# Altium PCB PCB2.PcbDoc (part 2 of 3)
Units mil, origin at the board's own origin, x right, y up, seen from the top; angles counter-clockwise.
Board outline 5145 x 1874.68 mil, 6 copper layers (Top Copper, Signal Layer 1, Signal Layer 2, Signal Layer 3, Signal Layer 4, Bottom Copper), stack 60.567 mil thick; 68 components, 78 nets, 530 pads, 288 vias.
Unrouted connection lines stored in the file: 13.
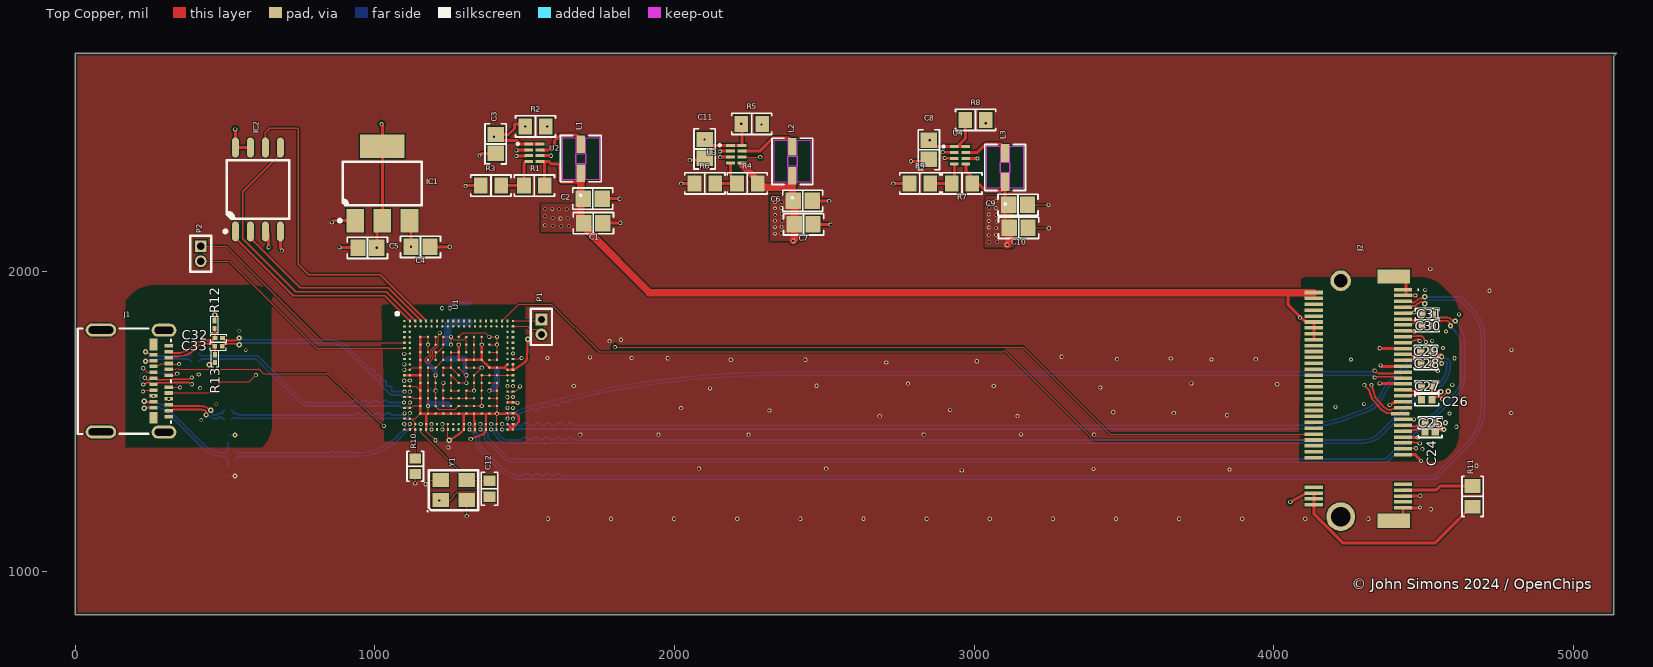
[diagram p0: Top Copper view]

## Via types
v1: diameter 13.78, hole 7.87, Top Copper to Bottom Copper, 220 vias
v2: diameter 11.81, hole 7.87, Top Copper to Bottom Copper, 44 vias
v3: diameter 17.72, hole 7.87, Top Copper to Bottom Copper, 24 vias

## Nets (pads, with @x,y where several pads share a name; then routed paths per layer and width w, separated by ;. In a path a pad name is that pad's centre, name@x,y a point inside that pad or via, vN(x,y) a via of type N, cw(c..) or ccw(c..) an arc to the next point about the centre after c; other vN are vias at no path point) (continued)
GND: C1.1 C2.1 C3.1 C4.1 C5.1 C6.1 C7.1 C8.1 C9.1 C10.1 C11.1 C13.1 C14.1 C15.1 C16.1 C17.1 C18.1 C19.1 C20.1 C21.1 C22.1 C23.1 IC1.1 IC2.4 J1.A1 J1.A12 J1.B1 J1.B12 J1.S J2.1 J2.3 J2.9 J2.15 J2.21 J2.27 J2.33 J2.39 J2.45 J2.51 J2.57 J2.71 J2.75 J2.MP1 J2.MP2 R3.1 R6.1 R9.1 R10.1 R12.2 R13.1 R14.2 R15.2 U1.AA1 U1.AA2 U1.AA5 U1.AA9 U1.AA12 U1.AA14 U1.AA16 U1.AA18 U1.AA20 U1.AA21 U1.D4 U1.D5 U1.D11 U1.D17 U1.D18 U1.E4 U1.E5 U1.E17 U1.E18 U1.F4 U1.F5 U1.F8 U1.F17 U1.F18 U1.H4 U1.H8 U1.H17 U1.H18 U1.H21 U1.J4 U1.J5 U1.J6 U1.J11 U1.K2 U1.L1 U1.L2 U1.L4 U1.L5 U1.L9 U1.L13 U1.M20 U1.M21 U1.N1 U1.N2 U1.N4 U1.N5 U1.N9 U1.N11 U1.N13 U1.N17 U1.N18 U1.P4 U1.P5 U1.P9 U1.P11 U1.P17 U1.P18 U1.P20 U1.P21 U1.R1 U1.R2 U1.T4 U1.T5 U1.T17 U1.T18 U1.T20 U1.T21 U1.U1 U1.U2 U1.U4 U1.U5 U1.U17 U1.U18 U1.V4 U1.V5 U1.V6 U1.V8 U1.V9 U1.V11 U1.V13 U1.V14 U1.V16 U1.V17 U1.V18 U1.V20 U1.V21 U1.W1 U1.W2 U1.Y3 U1.Y5 U1.Y9 U1.Y12 U1.Y14 U1.Y16 U1.Y18 U1.Y20 U1.Y21 U2.2 U2.3 U3.2 U3.3 U4.2 U4.3 Y1.2 Y1.4 | length 5285.2
  Top Copper w3.5: U1.AA1@1098.9,1473.9 U1.AA2@1117.01,1473.9 1120.86,1473.9 1134.28,1487.32 1134.28,1491.17 U1.Y3@1135.12,1492.01 1134.28,1492.84 1134.28,1496.93 1121.1,1510.12 ; U1.W1@1098.9,1510.12 U1.W2@1117.01,1510.12 1121.1,1510.12 ; U1.U1@1098.9,1546.34 U1.U2@1117.01,1546.34 1122.32,1546.34 1128.62,1552.64 U1.U4@1152.05,1552.64 ; U1.R1@1098.9,1582.56 U1.R2@1117.01,1582.56 1123.31,1582.56 1127.64,1578.23 U1.T4@1152.05,1578.23 ; U1.N1@1098.9,1618.78 1137.09,1618.78 U1.P4@1152.05,1603.82 ; U1.K2@1117.01,1673.11 1124.49,1680.59 U1.J4@1152.05,1680.59 ; v1(1134.84,1294.29) R10.1@1134.84,1325.79 ; U1.V4@1152.05,1527.05 1135.12,1510.12 1121.1,1510.12 ; U1.D4@1152.05,1782.95 U1.D5@1177.64,1782.95 v1(1177.64,1757.36) U1.F5@1177.64,1731.77 ; v1(1169.29,1291.34) 1183.07,1305.12 Y1.4@1219.49,1305.12 ; U1.AA5@1171.34,1473.9 1172.18,1473.06 1172.18,1468.57 v1(1202.76,1437.99) ; U1.V5@1177.64,1527.05 v1(1177.64,1552.64) U1.T5@1177.64,1578.23 U1.P5@1177.64,1603.82 U1.N5@1177.64,1629.41 U1.L5@1177.64,1655 U1.J5@1177.64,1680.59 U1.J6@1203.23,1680.59 U1.H8@1228.82,1706.18 U1.F8@1228.82,1731.77 ; U1.Y9@1243.78,1492.01 U1.AA9@1243.78,1473.9 1243.78,1446.09 1248.03,1441.84 v3(1248.03,1437.99) ; U1.P11@1280,1603.82 U1.P9@1254.41,1603.82 U1.N9@1254.41,1629.41 U1.L9@1254.41,1655 U1.N11@1280,1629.41 v1(1305.59,1629.41) v1(1305.59,1655) U1.J11@1280,1680.59 ; U1.D11@1280,1782.95 1294.29,1797.24 1368.07,1797.24 v1(1382.36,1782.95) v1(1407.95,1782.95) v1(1407.95,1757.36) ; Y1.2@1306.1,1238.19 1306.1,1185.8 v1(1307.11,1184.79) ; U1.U17@1382.36,1552.64 U1.U18@1407.95,1552.64 ; U1.T17@1382.36,1578.23 U1.T18@1407.95,1578.23 ; v1(1382.36,1603.82) U1.P18@1407.95,1603.82 ; U1.N17@1382.36,1629.41 U1.N18@1407.95,1629.41 U1.P18@1407.95,1603.82 ; U1.H17@1382.36,1706.18 U1.H18@1407.95,1706.18 U1.F18@1407.95,1731.77 ; U1.F17@1382.36,1731.77 U1.F18@1407.95,1731.77 ; U1.E17@1382.36,1757.36 v1(1407.95,1757.36) ; U1.AA18@1406.77,1473.9 U1.Y18@1406.77,1492.01 1407.36,1492.6 1407.36,1526.46 v1(1407.95,1527.05) U1.U18@1407.95,1552.64 ; U1.P20@1442.99,1600.67 U1.P21@1461.1,1600.67 1461.94,1601.51 1470.85,1601.51 1475.45,1606.11 ccw(c1472.99,1608.6) 1475.61,1606.28 1476.1,1606.84 ccw(c1473.48,1609.15) 1476.24,1607 v1(1484.67,1617.93) ; U1.Y21@1461.1,1492.01 1472.32,1492.01 ; U1.H21@1461.1,1709.33 1461.94,1710.17 1487.73,1710.17 v1(1490.16,1712.6) ; C9.1@3178.15,2223.43 v1(3248.03,2223.43) ; C10.1@3180.12,2146.65 3248.03,2146.65 v1(3249.02,2145.67) ; U1.U18@1407.95,1552.64 U1.T18@1407.95,1578.23 ; U1.T18@1407.95,1578.23 U1.P18@1407.95,1603.82 ; U1.F18@1407.95,1731.77 v1(1407.95,1757.36)
  Top Copper w7.87: U1.L1@1098.9,1655 1125.96,1655 U1.L4@1152.05,1655 ; U1.D4@1152.05,1782.95 U1.E4@1152.05,1757.36 U1.F4@1152.05,1731.77 U1.H4@1152.05,1706.18 U1.J4@1152.05,1680.59 U1.L4@1152.05,1655 ; U1.AA5@1171.34,1473.9 1171.34,1522.43 U1.V5@1175.95,1527.05 ; v3(1248.03,1437.99) 1286.77,1463.01 ccw(c1281.77,1470.75) 1288.58,1464.55 1296.73,1473.49 cw(c1304.59,1473.9) 1296.72,1473.9 1296.72,1527.05 ; v1(1320.47,1441.81) 1341.8,1450.67 cw(c1344.82,1443.4) 1341.94,1450.73 1358.93,1457.41 ccw(c1352.44,1473.9) 1368.84,1467.21 1370.36,1470.92 ccw(c1363.07,1473.9) 1370.94,1473.9 1370.94,1525.67 1369.57,1527.05 ; 1333.94,1466.56 1333.94,1499.35 1331.18,1502.1 U1.V14@1331.18,1527.05 ; U1.AA20@1442.99,1473.9 U1.AA21@1461.1,1473.9 ; U1.Y20@1442.99,1492.01 U1.AA21@1461.1,1473.9 ; U1.T20@1442.99,1564.45 1462.09,1564.45 v1(1476.38,1562.99) ; U1.L4@1152.05,1655 U1.N4@1152.05,1629.41 U1.P4@1152.05,1603.82 U1.T4@1152.05,1578.23 U1.U4@1152.05,1552.64 U1.V4@1152.05,1527.05 U1.V5@1177.64,1527.05 U1.V6@1203.23,1527.05 U1.V8@1228.82,1527.05 U1.V9@1254.41,1527.05 U1.V11@1280,1527.05 1296.72,1527.05 ; 1296.72,1527.05 U1.V13@1305.59,1527.05 U1.V14@1331.18,1527.05 ; U1.V14@1331.18,1527.05 U1.V16@1356.77,1527.05 1369.57,1527.05 ; 1369.57,1527.05 U1.V17@1382.36,1527.05 v1(1407.95,1527.05) 1434.87,1527.05 1435.65,1527.83 1470.2,1527.83 1480.32,1517.72 1480.32,1500 1472.32,1492.01 1461.1,1480.79 U1.AA21@1461.1,1473.9
  Top Copper w8: v3(447.83,1690.14) R13.1@466.54,1697.83 ; R12.2@465.55,1836.61 v3(465.55,1857.28)
  Top Copper w10: IC2.4@685,2135.24 685,2077.91 689.96,2072.95 v1(689.96,2070.87) ; v1(856.3,2165.35) 861.93,2170.98 IC1.1@934.45,2170.98 ; v1(881.89,2081.69) 941.93,2081.69 C5.1@943.9,2079.72 ; C4.1@1184.06,2083.66 v1(1250,2083.66) ; v1(1302.52,2286.18) 1304.02,2287.68 R3.1@1352.99,2287.68 ; v1(1349.41,2387.8) 1350.43,2387.8 1358.31,2395.67 C3.1@1403.54,2395.67 ; v1(1472.44,2386.81) 1503.07,2386.81 1503.94,2387.68 1503.94,2387.83 U2.3@1513.44,2387.83 ; v1(1472.44,2405.51) 1473.58,2406.65 1473.77,2406.65 1474.63,2407.52 U2.2@1513.44,2407.52 ; C2.1@1758.86,2244.09 v1(1816.93,2244.09) ; C1.1@1760.83,2162.4 1818.19,2162.4 v1(1819.66,2163.88) ; v1(2022.64,2294.29) 2065.94,2294.29 R6.1@2066.93,2295.28 ; v1(2051.18,2373.03) 2077.83,2373.03 C11.1@2100.39,2378.94 ; v1(2151.57,2401.57) 2152.83,2402.83 U3.2@2187.26,2402.83 ; v1(2152.56,2382.87) 2152.83,2383.15 U3.3@2187.26,2383.15 ; C6.1@2459.65,2237.2 2515.75,2237.2 v1(2516.73,2236.22) ; C7.1@2462.6,2158.46 2463.25,2157.81 v1(2521.17,2157.81) ; v1(2730.32,2294.29) 2783.46,2294.29 R9.1@2784.45,2295.28 ; v1(2789.37,2369.09) 2826.85,2369.09 C8.1@2849.41,2375.98 ; v1(2894.9,2399.61) 2900.55,2399.9 cw(c2901.57,2379.92) 2902.13,2399.91 2930.99,2399.11 cw(c2930.71,2389.12) 2932.23,2399 U4.2@2934.19,2398.7 ; v1(2901.57,2379.92) U4.3@2934.19,2379.02 ; v1(4353.35,1627.95) 4354.41,1626.89 4430.2,1626.89 J2.33@4431.1,1625.98 ; v1(4353.35,1745.08) 4353.84,1744.59 4430.61,1744.59 J2.21@4431.1,1744.09 ; v1(4356.3,1687.99) 4358.39,1687.99 4361.34,1685.04 J2.27@4431.1,1685.04 ; v1(4386.81,1556.1) 4405.59,1566.02 J2.39@4431.1,1566.93 ; J2.MP2@4400.59,1169.29 4412.48,1169.29 4431.1,1187.91 J2.75@4431.1,1212.6 4487.2,1212.6 v1(4488.19,1213.58) ; J2.MP1@4400.59,1984.25 4422.4,1984.25 4441.02,1965.63 4441.02,1940.94 4441.93,1940.04 4441.93,1921.26 4456.61,1921.26 v1(4472.44,1921.26) ; J2.71@4431.1,1251.97 4431.59,1252.46 4488.68,1252.46 v1(4489.17,1252.95) ; J2.57@4431.1,1389.76 4472.44,1389.76 4479.73,1382.48 4479.73,1381.26 4491.42,1369.57 v1(4491.42,1369.24) ; J2.51@4431.1,1448.82 4456.61,1447.91 v1(4480.47,1447.26) ; J2.45@4431.1,1507.87 4456.61,1506.97 ccw(c4456.97,1516.96) 4457.56,1506.98 v1(4468.03,1507.6) ; J2.15@4431.1,1803.15 4456.61,1802.24 v1(4470,1801.88) ; J2.9@4431.1,1862.2 4456.61,1863.11 v1(4468.9,1864.29)
  Bottom Copper w3.5: R14.2@509.25,1320.87 ccw(c514,1325.62) 514,1318.9 v3(533.46,1318.9) ; R15.2@510.83,1455.71 v3(533.46,1455.71)
  Bottom Copper w15: v1(1250.51,1878.43) 1250.51,1883.39 1262.8,1895.67 C13.1@1314.96,1895.67 ; C20.1@1300.2,1709.65 1300.2,1660.39 v1(1305.59,1655)
  Bottom Copper w20: C18.1@1180.12,1562.01 1183.56,1558.56 1242.62,1558.56 C22.1@1246.06,1555.12 ; C15.1@1243.11,1708.66 1243.6,1709.15 1299.7,1709.15 C20.1@1300.2,1709.65 ; C23.1@1395.67,1611.22 1395.67,1613.19 1408.46,1625.98 C21.1@1408.46,1673.23
  other v1: 1577.69,1176.34 1788.32,1176.34 1998.95,1176.34 2209.58,1176.34 2420.21,1176.34 2630.84,1176.34 2841.47,1176.34 3052.1,1176.34 3262.73,1176.34 3473.36,1176.34 3683.99,1176.34 3894.62,1176.34 4105.25,1176.34 4315.88,1176.34 4524.15,1207.82 2958.66,1337.6 3852.36,1340.55 3398.38,1342.59 2081.69,1343.5 2506.65,1343.57 4676.59,1353.17 1245.56,1413.99 1686.02,1456.69 1946.85,1456.69 2247.05,1456.69 2831.69,1456.69 3400.59,1456.69 3156.5,1457.68 2685.04,1518.7 3144.68,1518.7 3844.49,1521.65 3666.1,1528.61 4792.17,1529.25 3464.32,1531.56 2316.69,1537.47 2920.03,1539.44 2021.65,1545.28 4206.04,1549.5 4301.71,1559.45 2118.85,1611.29 417.32,1612.2 3421.26,1614.17 1664.13,1619.16 3065.7,1619.16 2474.17,1620.15 4011.57,1625.07 2779.53,1626.97 3725.15,1628.02 412.4,1657.48 2707.02,1697.46 3008.62,1701.84 2187.75,1706.76 2436.77,1706.76 3792.08,1707.75 4257.63,1707.75 3477.12,1708.73 3939.72,1708.73 3656.25,1710.7 1977.12,1711.68 4603.35,1711.61 1576.53,1712.67 1857.04,1712.67 1718.26,1714.63 3292.08,1716.6 4793.55,1739.88 1783.46,1768.7 1821.85,1773.62 1224.92,1878.43 4719.88,1937.2 4522.17,2009.84
  other v2: 421.26,1505.91 470.47,1558.07 568.9,1739.17 548.23,1803.15
NetJ2_69: J2.69 R11.1 | length 238
  Top Copper w10: J2.69@4431.1,1271.65 4431.26,1271.81 4542.03,1271.81 4555.65,1285.43 R11.1@4663.39,1285.43
NetL1_2: L1.2 U2.7 | length 185.7
  Top Copper w10: U2.7@1551.44,2407.52 1580.94,2407.52 1599.43,2426.01 1599.43,2437.69 1617.92,2456.18 1674.96,2456.18 1679.94,2451.2 1679.94,2433.7 L1.2@1687.44,2426.2
NetL2_2: L2.2 U3.7 | length 209.5
  Top Copper w10: U3.7@2225.26,2402.83 2284.71,2402.83 2329.18,2447.3 2381.22,2447.3 2386.2,2442.32 2386.2,2424.82 L2.2@2393.7,2417.32
NetL3_2: L3.2 U4.7 | length 165.5
  Top Copper w10: U4.7@2972.19,2398.7 3010.6,2398.7 3038.83,2426.93 3090.87,2426.93 3095.85,2421.95 3095.85,2404.45 L3.2@3103.35,2396.95
NetP1_1: P1.1 U1.A21 | length 95.8
  Top Copper w3.5: U1.A21@1461.1,1836.1 1538.17,1836.1 P1.1@1556.1,1841.54
NetP1_2: P1.2 U1.B21 | length 105.7
  Top Copper w3.5: U1.B21@1461.1,1817.99 1510.75,1817.99 1520.67,1808.07 1538.31,1808.07 1539,1807.75 cw(c1537.54,1804.57) 1539.97,1807.09 P1.2@1556.1,1791.54
NetP2_1: P2.1 U1.E1 | length 812.9
  Top Copper w3.5: P2.1@419.29,2085.43 505.12,2085.43 826.89,1763.66 U1.E1@1098.9,1763.66
NetP2_2: P2.2 U1.F1 | length 799.7
  Top Copper w3.5: P2.2@419.29,2035.43 515.75,2035.43 805.63,1745.55 U1.F1@1098.9,1745.55
NetR1_1: R1.1 R3.2 U2.4 | length 168.5
  Top Copper w10: R3.2@1421.89,2287.68 R1.1@1497.99,2287.68 1497.99,2362.2 1503.94,2368.15 U2.4@1513.44,2368.15
NetR2_2: R2.2 U2.6 | length 138.4
  Top Copper w10: U2.6@1551.44,2387.83 1587.28,2387.83 v1(1587.44,2387.68)
  Signal Layer 2 w10: v1(1575.87,2485.24) 1575.87,2425.75 1587.44,2414.17 v1(1587.44,2387.68)
NetR4_1: R4.1 R6.2 U3.4 | length 149.9
  Top Copper w10: R6.2@2135.83,2295.28 R4.1@2208.66,2295.28 2208.66,2299.21 2187.26,2320.61 U3.4@2187.26,2363.46
NetR5_2: R5.2 U3.6 | length 171.8
  Top Copper w3.5: U3.6@2225.26,2383.15 2286.14,2383.15 v1(2286.42,2382.87)
  Signal Layer 2 w3.5: v1(2286.42,2382.87) 2286.42,2487.78 v1(2290.39,2491.75)
NetR7_1: R7.1 R9.2 U4.4 | length 139.6
  Top Copper w10: R9.2@2853.35,2295.28 R7.1@2925.2,2295.28 2934.19,2304.27 U4.4@2934.19,2359.33
NetR8_2: R8.2 U4.6 | length 168.8
  Top Copper w10: U4.6@2972.19,2379.02 3010.6,2379.02 v1(3011.29,2378.33)
  Signal Layer 2 w10: v1(3011.29,2378.33) 3011.29,2467.98 v1(3039.37,2496.06)
PERST#: J2.50 U1.G21 | length 2802.9
  Top Copper w3.5: v1(1801.18,1749.02) 3163.39,1749.02 3453.74,1458.66 J2.50@4133.86,1458.66
  Signal Layer 2 w3.5: v1@1460.63,1726.38 1483.27,1749.02 v1(1801.18,1749.02)
  other v1: 1461.1,1727.44